# Altium PCB My主板_V5.PcbDoc
Units mil, origin at the board's own origin, x right, y up, seen from the top; angles counter-clockwise.
Board outline 4125 x 2480.2 mil, 2 copper layers (Top Layer, Bottom Layer); 56 components, 56 nets, 301 pads, 42 vias.
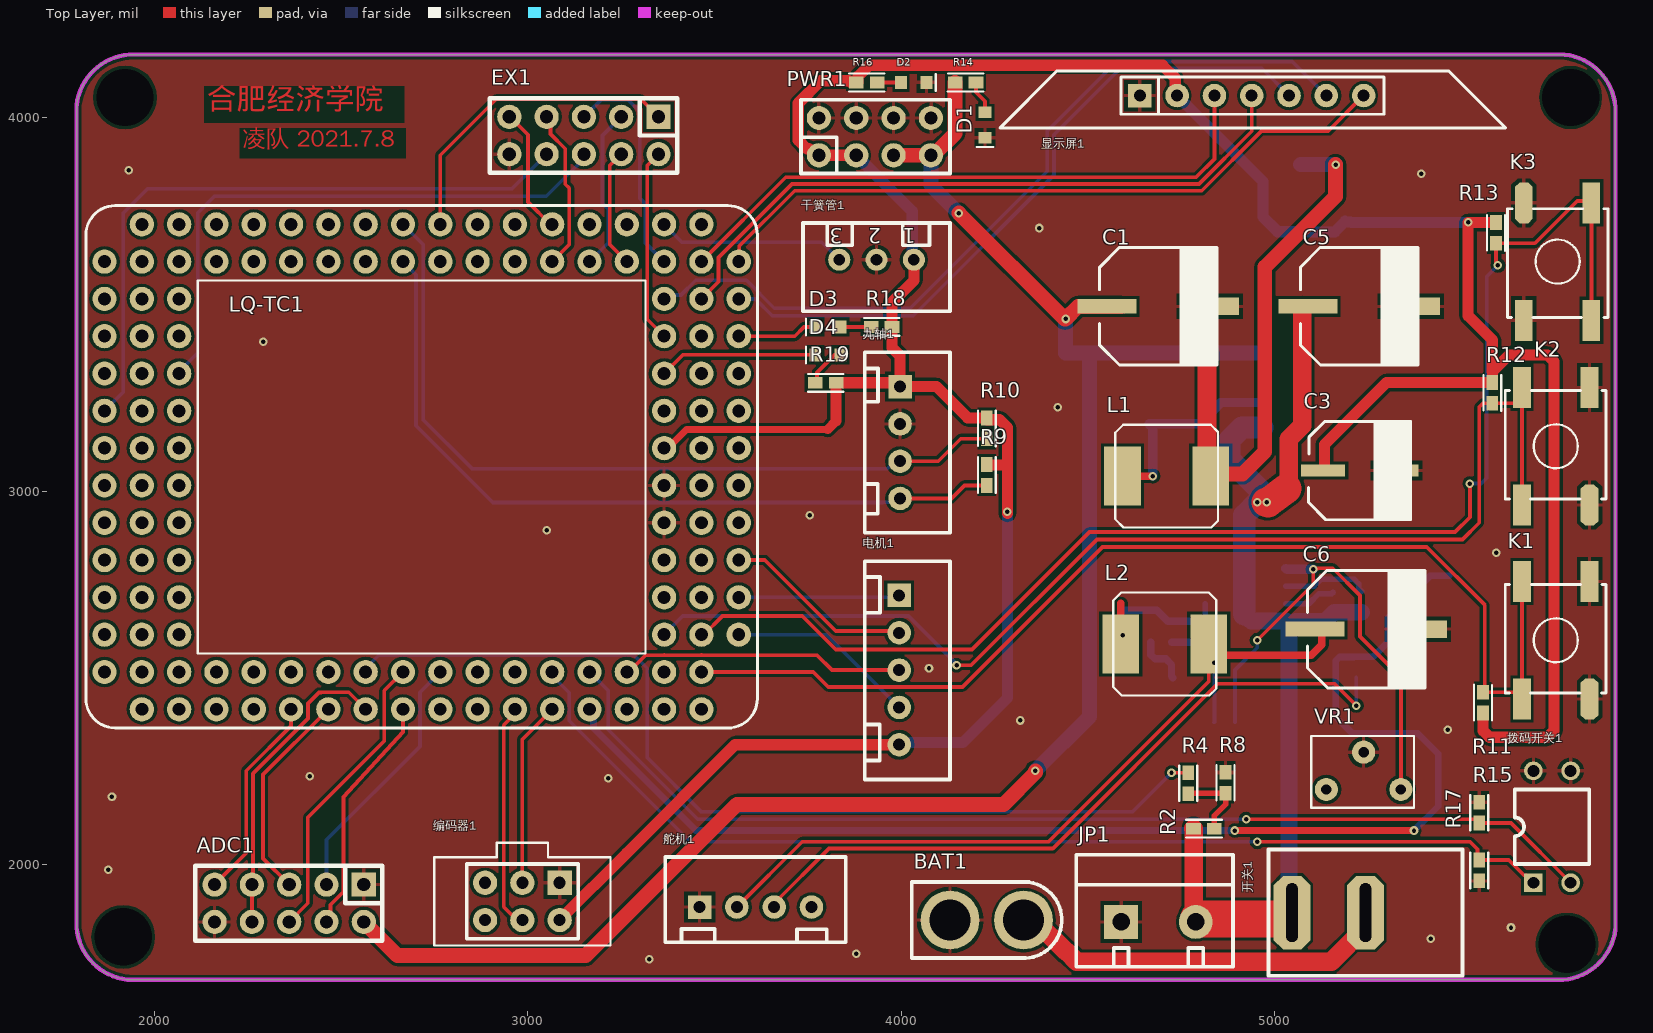
[diagram p0: Top Layer view]
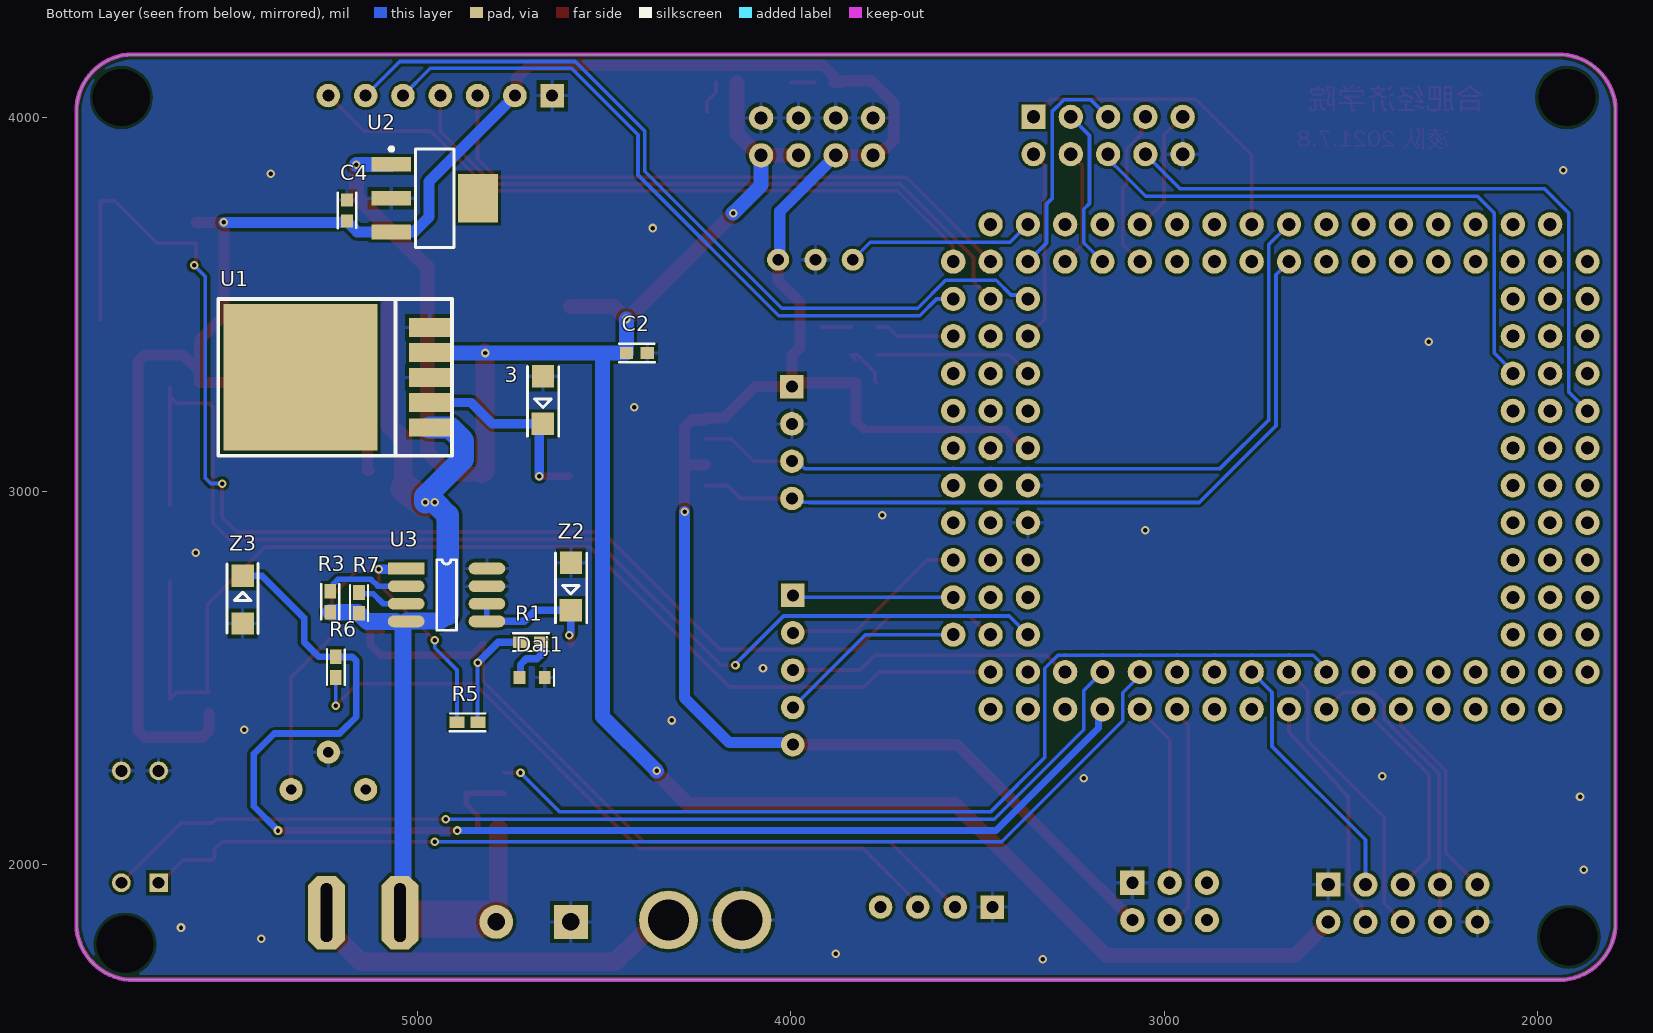
[diagram p1: Bottom Layer view, seen from below]

## Layer stack, top to bottom
Top Solder: solder mask 0.4, Solder Resist, Dk 3.5
Top Layer: signal copper 1.4
Dielectric 1: dielectric 12.6, FR-4, Dk 4.8
Bottom Layer: signal copper 1.4
Bottom Solder: solder mask 0.4, Solder Resist, Dk 3.5

## Board outline
1790,1830 ccw(c1943.01,1842.73) 1925.4,1690.2 1925.4,1689.8 5775,1689.8 5775,1690 ccw(c5762.27,1843.01) 5914.8,1825.4 5915,1825.4 5915,4030 ccw(c5761.99,4017.27) 5779.6,4169.8 5779.6,4170 1930,4170 ccw(c1942.73,4016.99) 1790.2,4034.6 1790,4034.6

## Design rules (kind name [scope] priority, off if disabled: settings)
Clearance [All] p1: gap=8 ignorepadtopadclearanceinfootprint=FALSE
PolygonConnect [All] p1: thpad.connectstyle=Relief thpad.reliefconductorwidth=10 thpad.reliefentries=4 thpad.polygonreliefangle="90 Angle" thpad.airgapwidth=10 smdpad.connectstyle=Relief smdpad.reliefconductorwidth=10 smdpad.reliefentries=4 smdpad.polygonreliefangle="90 Angle" smdpad.airgapwidth=10 via.connectstyle=Direct via.reliefconductorwidth=10 via.reliefentries=4 via.polygonreliefangle="90 Angle" via.airgapwidth=10
RoutingVias [All] p1: holewidth=12 width=25 viastyle="Through Hole" minholewidth=12 minwidth=22 maxholewidth=12 maxwidth=50
SolderMaskExpansion [All] p1: expansion=4 istentingtop=FALSE
Width 12V [InNetClass('12V')] p1: maxlimit=100 minlimit=10 preferedwidth=50
Width 5V [InNetClass('5V')] p2: maxlimit=100 minlimit=10 preferedwidth=40
Width 3.3V [InNetClass('3.3V')] p3: maxlimit=100 minlimit=10 preferedwidth=30
Width [All] p4: maxlimit=100 minlimit=10 preferedwidth=10
30 further rules are at their usual default settings.

## Classes and differential pairs
net class 3.3V: 3.3V
net class 5V: 5V
net class 12V: BAT12V VCC12V

## Components (designator, comment, footprint, x,y, rotation, side; value= is the part's Value field where it differs from the comment)
3 "1N5824" LQ_1206D 4664.61,3307.56 r270 bottom (schematic designator Z1)
ADC1 "双排针2*5 2.5mm" LQ_IDC5X2 2560,1945 r180 top
BAT1 "XT30UPB-M公头" LQ_XT30UPB-F 4230,1850 r180 top
C1 "470uf/16V  8*10" LQ_C8X10 4690,3495 r180 top
C2 "104nF" LQ_C0603 4441,3370 r180 bottom value=104
C3 "470uf/10V  6.3*7.7" LQ_C6d3X7d7 5230,3055 r180 top
C4 "104nF" LQ_C0603 5190,3780 r270 bottom value=104
C5 "220uf/16V  8*10" LQ_C8X10 5228.43,3495 r180 top
C6 "470uf/16V  8*10" LQ_C8X10 5247.2,2630 r180 top
D1 "LED红" LQ_LED0603R 4225,4015 r270 top
D2 "LED红" LQ_LED0603R 4000,4095 r0 top
D3 "LED红" LQ_LED0603R 3838,3440 r180 top
D4 "LED红" LQ_LED0603R 3838,3365 r180 top
Daj1 "LED红" LQ_LED0603R 4728,2500 r180 bottom
EX1 "单排针2*5-2.54mm" LQ_IDC5X2 3350,4003 r180 top
JP1 "HDR-1X2" KF301-5.0-2P 4790,1845 r0 top
K1 "微动开关6*6*6" LQ_BT4SMT 5755,2600 r180 top
K2 "微动开关6*6*6" LQ_BT4SMT 5755,3120 r180 top
K3 "微动开关6*6*6" LQ_BT4SMT 5760,3615 r0 top
L1 "33uH" LQ_L7X7 4593.78,3040 r0 top
L2 "33uH" LQ_L7X7 4588.78,2590 r0 top
LQ-TC1 "LQ-TC264-SYSVC" LQ-TC264-SYSVC-S 1965,2415 r0 top
PWR1 "双排针4X2-2.54" LQ_IDC4X2 3780,3900 r90 top
R1 "3K3" LQ_R0603 4669,2595 r0 bottom
R2 "4.7K" LQ_R0603 4784,2095 r0 top
R3 "1K" LQ_R0603 5235,2731 r270 bottom
R4 "2K" LQ_R0603 4770,2245 r270 top
R5 "1K" LQ_R0603 4895,2380 r180 bottom
R6 "2K" LQ_R0603 5220,2556 r270 bottom
R7 "2.7K" LQ_R0603 5158,2672 r90 bottom
R8 "1K" LQ_R0603 4870,2190 r90 top
R9 "2.2K" LQ_R0603 4230,3071 r270 top
R10 "2.2K" LQ_R0603 4230,3140 r90 top
R11 "1K" LQ_R0603 5560,2461 r270 top
R12 "1K" LQ_R0603 5585,3235 r90 top
R13 "1K" LQ_R0603 5595,3664 r90 top
R14 "1K" LQ_R0603 4145,4095 r0 top
R15 "2.2K" LQ_R0603 5550,2110 r90 top
R16 "1K" LQ_R0603 3880,4095 r0 top
R17 "2.2K" LQ_R0603 5550,2011 r270 top
R18 "1K" LQ_R0603 3976,3440 r180 top
R19 "1K" LQ_R0603 3826,3290 r180 top
U1 "LM2596CS-5.0V" LQ_TO-263-5 4968.54,3170.35 r90 bottom
U2 "LM39100 3.3V" SOT223_M 4955,3785 r180 bottom
U3 "AS1015" SOP8 5031.54,2792.24 r180 bottom
VR1 "2k" lq_3266 5140,2200 r0 top
Z2 "1N5824" LQ_1206D 4589.61,2807.56 r270 bottom
Z3 "ZMM3V3" LQ_1206D 5470,2645 r90 bottom
九轴1 "插针1*4" LQ_XH254-4P 4017.05,3280 r270 top
干簧管1 "XH254-3P" LQ_XH254-3P 4034.37,3620 r180 top
开关1 "KCD1-101 117S" "LQ_KCD1-101 117S" 5245,1870 r0 top
拨码开关1 "SW-DIP2" DIP4 5695,1950 r90 top
显示屏1 "单排座1*7-2.54" LQ-TFT-180V33 4940,4060 r0 top
电机1 "XH254-4P" LQ_XH254-5P 3995,2520 r270 top
编码器1 "双排针2*3 2.54mm" LQ_ENCODER 3085,1950 r180 top
舵机1 "插针1*4-2.54" LQ_XH254-4P 3460,1904.68 r0 top

## Footprints (in the part's own frame and the unit in brackets; to place one, negate y for a bottom-side part, rotate by r counter-clockwise, add the part's x,y. Pads: shape width x height; smd on the part's side, far side on the other; paste and mask are expansions set on the pad)
DIP4 [mil]
  rect 50x50 hole 32: 1(0,0)
  round 50 hole 32: 2(0,-100) 3(300,-100) 4(300,0)
  silkscreen extent 50,-150 250,50, body extent -45,-170 345,70, height 276
KF301-5.0-2P [mm]
  rect 2.3x2.3 hole 1.2: 1(-5.08,0)
  round 2.3 hole 1.2: 2(0,0)
  silkscreen extent -8.13,-3.05 2.54,4.57, body extent -7.95,-3 2.55,4.6, height 10.05
LQ-TC264-SYSVC-S [mm] "单片机核心板封装库"
  round 1.65 hole 0.88: 1(5.08,0) 2(5.08,2.54) 3(7.62,0) 4(7.62,2.54) 5(10.16,0) 6(10.16,2.54) 7(12.7,0) 8(12.7,2.54) 9(15.24,0) 10(15.24,2.54) 11(17.78,0) 12(17.78,2.54) 13(20.32,0) 14(20.32,2.54) 15(22.86,0) 16(22.86,2.54) 17(25.4,0) 18(25.4,2.54) 19(27.94,0) 20(27.94,2.54) 21(30.48,0) 22(30.48,2.54) 23(33.02,0) 24(33.02,2.54) 25(35.56,0) 26(35.56,2.54) 27(38.1,0) 28(38.1,2.54) 30(38.1,5.08) 31(35.56,5.08) 33(38.1,7.62) 34(35.56,7.62) 36(38.1,10.16) 37(35.56,10.16) 39(38.1,12.7) 40(35.56,12.7) 42(38.1,15.24) 43(35.56,15.24) 45(38.1,17.78) 46(35.56,17.78) 48(38.1,20.32) 49(35.56,20.32) 51(38.1,22.86) 52(35.56,22.86) 54(38.1,25.4) 55(35.56,25.4) 57(38.1,27.94) 58(35.56,27.94) 60(38.1,30.48) 61(35.56,30.48) 62(38.1,33.02) 63(35.56,33.02) 64(33.02,33.02) 65(33.02,30.48) 66(30.48,33.02) 67(30.48,30.48) 68(27.94,33.02) 69(27.94,30.48) 70(25.4,33.02) 71(25.4,30.48) 72(22.86,33.02) 73(22.86,30.48) 74(20.32,33.02) 75(20.32,30.48) 76(17.78,33.02) 77(17.78,30.48) 78(15.24,33.02) 79(15.24,30.48) 80(12.7,33.02) 81(12.7,30.48) 82(10.16,33.02) 83(10.16,30.48) 84(7.62,33.02) 85(7.62,30.48) 86(5.08,33.02) 87(5.08,30.48) 88(2.54,33.02) 89(0,33.02) 90(2.54,30.48) 91(0,30.48) 93(2.54,27.94) 94(0,27.94) 96(2.54,25.4) 97(0,25.4) 99(2.54,22.86) 100(0,22.86) 102(2.54,20.32) 103(0,20.32) 105(2.54,17.78) 106(0,17.78) 108(2.54,15.24) 109(0,15.24) 111(2.54,12.7) 112(0,12.7) 114(2.54,10.16) 115(0,10.16) 117(2.54,7.62) 118(0,7.62) 120(2.54,5.08) 121(0,5.08) 123(2.54,2.54) 124(0,2.54) 126(2.54,0) 127(0,0)
  round 1.65 hole 0.88 mask+0.102: 29(40.64,5.08) 32(40.64,7.62) 35(40.64,10.16) 38(40.64,12.7) 41(40.64,15.24) 44(40.64,17.78) 47(40.64,20.32) 50(40.64,22.86) 53(40.64,25.4) 56(40.64,27.94) 59(40.64,30.48) 92(-2.54,30.48) 95(-2.54,27.94) 98(-2.54,25.4) 101(-2.54,22.86) 104(-2.54,20.32) 107(-2.54,17.78) 110(-2.54,15.24) 113(-2.54,12.7) 116(-2.54,10.16) 119(-2.54,7.62) 122(-2.54,5.08) 125(-2.54,2.54)
  silkscreen extent -3.81,-1.27 41.91,34.29
LQ-TFT-180V33 [mm]
  rect 1.6x1.6 hole 0.82: 1(-7.62,0)
  round 1.6 hole 0.82: 2(-5.08,0) 3(-2.54,0) 4(0,0) 5(2.54,0) 6(5.08,0) 7(7.62,0)
  silkscreen extent -17.13,-2.19 17.27,1.69
LQ_1206D [mil]
  rect 60x60 smd: 1(0,0) 2(127.56,-0.39)
  silkscreen extent -27,-41 161,42, body extent -4,-30 133,29, height 61
lq_3266 [mil]
  round 62 hole 28: 1(0,0) 2(100,100) 3(200,0)
  silkscreen extent -40,-49 235,143
LQ_BT4SMT [mm]
  oct 1.2x2.8 smd: 1(-2.3,4)
  rect 1.2x2.8 smd: 1(-2.3,-4) 2(2.3,4) 2(2.3,-4)
  silkscreen extent -3.42,-3.8 3.44,3.6, body extent -3,-5.08 3,4.92, height 4.54
LQ_C6d3X7d7 [mm]
  rect 3x0.8 smd: 1(2.5,0) 2(-2.5,0)
  silkscreen extent -3.49,-3.37 3.49,3.35, body extent -3.5,-3.3 3.5,3.3, height 7.7
LQ_C8X10 [mm]
  rect 4x1 smd: 1(3.5,0)
  rect 4x1.2 smd: 2(-3.5,0)
  silkscreen extent -4,-4 4,4, body extent -4.95,-4.15 4.95,4.15, height 10.2
LQ_C0603 [mm]
  rect 0.9x0.8 smd: 1(0,0) 2(1.422,0)
  silkscreen extent -0.5,-0.64 1.92,0.64, body extent -0.08,-0.4 1.52,0.4, height 0.3
LQ_ENCODER [mm]
  rect 1.65x1.65 hole 0.82: 1(0,0)
  round 1.65 hole 0.82: 2(0,2.54) 3(2.54,0) 4(2.54,2.54) 5(5.08,0) 6(5.08,2.54)
  silkscreen extent -3.46,-2.73 8.54,4.27, body extent -1.31,-1.31 6.31,3.77, height 8.5
LQ_IDC4X2 [mm]
  round 1.65 hole 0.9: 1(0,0) 2(2.54,0) 3(0,-2.54) 4(2.54,-2.54) 5(0,-5.08) 6(2.54,-5.08) 7(0,-7.62) 8(2.54,-7.62)
  silkscreen extent -1.24,-8.92 3.78,1.22, body extent -1.17,-9.01 3.83,1.4, height 8.5
LQ_IDC5X2 [mm]
  rect 1.65x1.65 hole 0.9: 1(0,0)
  round 1.65 hole 0.9: 2(0,2.54) 3(2.54,0) 4(2.54,2.54) 5(5.08,0) 6(5.08,2.54) 7(7.62,0) 8(7.62,2.54) 9(10.16,0) 10(10.16,2.54)
  silkscreen extent -1.27,-1.27 11.48,3.81, body extent -1.25,-1.26 11.45,3.82, height 8.5
"LQ_KCD1-101 117S" [mm]
  oct 2.5x5 hole 0.8 slot 4 at 90 deg: 1(0,0) 2(-5,0)
  silkscreen extent -6.61,-4.3 6.6,4.3
LQ_L7X7 [mm]
  rect 2.5x4 smd: 1(0,0) 2(6,0)
  silkscreen extent -0.5,-3.5 6.5,3.5
LQ_LED0603R [mm]
  rect 0.8x0.9 smd: 1(0,0) 2(1.727,0)
  silkscreen extent 2.36,-0.56 2.36,0.58, body extent 0.02,-0.45 1.72,0.45, height 0.9
LQ_R0603 [mm]
  rect 1x0.8 smd: 1(0,0) 2(1.422,0)
  silkscreen extent -0.5,-0.61 1.92,0.61, body extent -0.08,-0.4 1.52,0.4, height 0.48
LQ_TO-263-5 [mil]
  rect 393.7x413.39 smd: 0(134.65,346.46)
  rect 48x110 smd: 1(0,0)
  rect 50x110 smd: 2(67,0) 3(134,0) 4(201,0) 5(268,0)
  silkscreen extent -76,-60 344,567, body extent -65,-16 335,536, height 180
LQ_XH254-3P [mm]
  round 1.5 hole 0.8: 1(0,0) 2(2.54,0) 3(5.08,0)
  silkscreen extent -2.46,-2.5 7.54,3.5, body extent -2.43,-2.37 7.57,3.33, height 7
LQ_XH254-4P [mm]
  rect 1.6x1.6 hole 0.82: 1(0,-0.5)
  round 1.6 hole 0.82: 2(2.54,-0.5) 3(5.08,-0.5) 4(7.62,-0.5)
  silkscreen extent -2.33,-2.9 9.96,2.9, body extent -2.45,-2.81 10.05,2.89, height 7
LQ_XH254-5P [mm]
  rect 1.6x1.6 hole 0.82: 1(-5.08,0)
  round 1.6 hole 0.82: 2(-2.54,0) 3(0,0) 4(2.54,0) 5(5.08,0)
  silkscreen extent -7.42,-2.34 7.45,3.46, body extent -7.52,-2.31 7.48,3.39, height 7
LQ_XT30UPB-F [mm]
  round 4 hole 2.8: 1(2.5,0) 2(-2.5,0)
  silkscreen extent -5.1,-2.59 5.11,2.6
SOP8 [mm]
  rect 2.5x0.8 smd: 1(0,0)
  oval 2.5x0.8 smd: 2(0,-1.2) 3(0,-2.4) 4(0,-3.6) 5(5.5,-3.6) 6(5.5,-2.4) 7(5.5,-1.2) 8(5.5,0)
  silkscreen extent 2.08,-4.2 3.41,0.6
SOT223_M [mm] "SOT223, 4-Leads, Body 6.5x3.5mm, Pitch 2.3mm, Lead Span 7mm, IPC Low Density"
  rect 2.7x1 smd: 1(-2.95,2.3) 2(-2.95,0) 3(-2.95,-2.3)
  rect 2.7x3.3 smd: 4(2.95,0)
  silkscreen extent -3.08,-3.35 1.3,3.47, body extent -1.85,-3.35 1.85,3.35, height 1.7

## Part data
3 Z2 Z3: library part LQ_D, "Schottky Diode"
ADC1: library part CON10, "Connector"
BAT1: library part LQ_PIN2, "Jumper"
C1 C3 C5 C6: library part "CAPACITOR POL", "Capacitor"
C2 C4: library part Cap, "Capacitor", LatestRevisionDate=17-Jul-2002, LatestRevisionNote="Re-released for DXP Platform.", PackageDescription="Radial Cap, Thru-Hole; 2 Leads; 0.3 in Pin Spacing", PackageReference=RAD-0.3, Published=8-Jun-2000, Publisher="Altium Limited"
D1 D2 D3 D4: library part LED
Daj1: library part LQ_LED
EX1: library part "HEADER 5X2"
JP1: library part "Header 2_1", "2P接插件", BOM名称=2P接插件, 学习资源=www.ooocke.com, 版权归属=源创客
K1 K2 K3: library part 微动开关
L1 L2: library part INDUCTOR
PWR1: library part "HEADER 4X2"
R1 R2 R3 R4 R5 R6 R7 R8 R9 R10 R11 R12 R13 R14 R15 R16 R17 R18 R19: library part RES2
U1: library part LM2575T
U2: library part VOLTREG
VR1: library part "RESISTOR TAPPED"
九轴1 舵机1: library part CON4, "Connector"
干簧管1: library part "HEADER 3"
开关1: library part LQ_SWMTS102, "LQ_SWMTS102"
显示屏1: library part LQ_OLED128X64
电机1: library part "Header 5", "Header, 5-Pin", LatestRevisionDate=17-Jul-2002, LatestRevisionNote="Re-released for DXP Platform.", Publisher="Altium Limited"
编码器1: library part "Header 3X2", "Header, 3-Pin, Dual row", LatestRevisionDate=17-Jul-2002, LatestRevisionNote="Re-released for DXP Platform.", Publisher="Altium Limited"

## Free pads (board coordinates)
  round 60 hole 153.54: 2(1915,1805) 2(1920,4055) 2(5785,1785) 2(5795,4055)

## Via types
v1: diameter 23, hole 12, Top Layer to Bottom Layer, tented both sides, 42 vias

## Nets (pads, with @x,y where several pads share a name; then routed paths per layer and width w, separated by ;. In a path a pad name is that pad's centre, name@x,y a point inside that pad or via, vN(x,y) a via of type N, cw(c..) or ccw(c..) an arc to the next point about the centre after c; other vN are vias at no path point)
3.3V: C3.1 C4.2 LQ-TC1.46 PWR1.1 PWR1.3 R9.1 R10.2 R11.2 R12.2 R13.2 R16.1 R18.1 R19.1 U2.3 九轴1.1 干簧管1.1 显示屏1.2 电机1.5 编码器1.2 | length 8951
  Top Layer w18: LQ-TC1.46 3375,3115 3425,3165 3803.43,3165
  Top Layer w25: 3803.43,3165 3826,3187.57
  Top Layer w30: 编码器1.2 3265,2030 3555,2320 电机1.5 ; PWR1.1 3770.54,3900 3753.25,3917.29 3747.71,3917.29 3724.52,3940.48 3724.52,4039.52 3785,4100 3860.78,4100 3865.03,4095.75 3875.32,4095.75 3876.06,4095 3883.94,4095 3884.68,4095.75 3884.68,4105 3884.68,4111.65 3914.13,4141.09 4701.33,4141.09 4735,4107.43 4735,4065 显示屏1.2 ; PWR1.1@3801.54,3900 PWR1.3 ; 3826,3187.57 R19.1 3987.36,3290 九轴1.1 3997.36,3362.64 3976,3384 R18.1 3976,3506 4034.37,3564.37 干簧管1.1 ; 九轴1.1@4020,3280 4095,3280 4179,3196 R10.2 4230,3192.06 4230.75,3191.32 4263.69,3191.32 4285,3170 v1(4285,2945) v1@4285,2940.07 ; R9.1 4230,3070.75 4230.75,3070 4270.07,3070 ; C3.1 5134.25,3055 5135,3055.75 5135,3125 5301,3291 R12.2 5585.75,3291.75 5585.75,3320.75 5630,3365 5732.43,3365 5750,3347.43 5750,2357.57 5732.43,2340 5577.57,2340 5560,2357.57 R11.2 ; 5585,3320.75 5585,3405 5520,3470 v1(5520,3720) R13.2
  Bottom Layer w30: PWR1.3 4030,3750 4030,3624.37 干簧管1.1 ; 电机1.5 4001.31,2326.31 4166.31,2326.31 4285,2445 v1(4285,2945) ; 显示屏1.2 4970,3830 4970,3735 5010,3695 5070.59,3695 U2.3 5162.42,3694.45 C4.2@5190,3722.03 ; C4.2 C4.2@5190,3722.03 ; v1(5520,3720) 5206.25,3720 5204.97,3721.28 5190.75,3721.28 C4.2@5190,3722.03
5V: ADC1.2 C1.1 C2.1 L1.2 PWR1.5 PWR1.7 R14.1 U1.4 U2.1 | length 6373.3
  Top Layer w40: ADC1.2 2650,1755 3155,1755 3560,2160 4275,2160 4360,2245 v1(4360,2250) ; PWR1.5 PWR1.7 4086.75,3900 4145,3958.25 R14.1 ; v1(4155,3745) 4438.8,3461.2 v1(4441,3461.2) 4474.8,3495 C1.1@4591.57,3495 ; L1.2@4820,3050 L1.2 4836.12,3046.12 4915.78,3046.12 4975,3105.34 4975,3600 5165,3790 v1(5165,3875)
  Top Layer w50: L1.2@4820,3050 v1(4820,3370)
  Bottom Layer w40: PWR1.7 4080,3820 v1(4155,3745) ; v1(4360,2250) 4505,2395 4505,3370 ; v1(4441,3461.2) C2.1 4505,3370 ; U1.4 4967.19,3370 v1(4820,3370) 4505,3370 ; U2.1 5164.45,3875.55 v1(5165,3875)
13.0: EX1.1 LQ-TC1.74 | length 851.6
  Top Layer w10: LQ-TC1.74 2765,3900 2915,4050 3303,4050 EX1.1
AN1: ADC1.3 LQ-TC1.14 | length 696.3
  Bottom Layer w10: ADC1.3 2460,2065 2710.48,2315.48 2710.48,2460.48 LQ-TC1.14
AN2: ADC1.4 LQ-TC1.11 | length 650.8
  Top Layer w10: ADC1.4 2470.52,1855.52 2470.52,1891.2 2505.48,1926.16 2505.48,2180.06 2665,2354.34 LQ-TC1.11
AN3: ADC1.5 LQ-TC1.7 | length 571.5
  Top Layer w10: ADC1.5 2290,2015 2290,2240 LQ-TC1.7
AN4: ADC1.6 LQ-TC1.12 | length 796.3
  Top Layer w10: ADC1.6 2410,1895 2410,2125 2615,2330 2615,2465 LQ-TC1.12
AN5: ADC1.7 ADC1.8 LQ-TC1.9 | length 833.6
  Top Layer w10: ADC1.8 ADC1.7 2263,1948 2263,2242.54 2410.48,2390.02 2410.48,2430.48 2440,2460 2445.68,2460 2446.16,2460.48 2519.52,2460.48 LQ-TC1.9
AN6: ADC1.9 LQ-TC1.5 | length 554.9
  Top Layer w10: ADC1.9 2245,2030 2245,2250 2365,2370 LQ-TC1.5
AN7: LQ-TC1.10 R4.1 | length 2587.5
  Top Layer w10: v1(4725,2245) R4.1
  Bottom Layer w10: LQ-TC1.10 2565,2525 2600,2560 2658.41,2560 cw(c2665,2515) 2671.59,2560 2758.41,2560 cw(c2765,2515) 2771.59,2560 2858.41,2560 cw(c2865,2515) 2871.59,2560 2958.41,2560 cw(c2965,2515) 2971.59,2560 3058.41,2560 cw(c3065,2515) 3071.59,2560 3158.41,2560 cw(c3165,2515) 3171.59,2560 3258.41,2560 cw(c3265,2515) 3271.59,2560 3284.32,2560 3319.52,2524.8 3319.52,2285.48 3465,2140 4620,2140 v1(4725,2245)
BAT12V: C5.1 JP1.2 R2.1 R3.2 R7.1 U1.1 U3.4 开关1.2 | length 2795.2
  Top Layer w50: R2.1 4785,2094 4785,1850 JP1.2 ; 开关1.2@5030.91,1852.76 开关1.2 ; 5033.94,3007.12 5039.52,3012.7 5039.52,3139.52 5075,3175 C5.1@5075,3489.69
  Top Layer w80: v1(4980,2970) 4983.47,2969.49 5033.94,3007.12
  Top Layer w100: JP1.2@4797.76,1852.76 开关1.2@5030.91,1852.76
  Bottom Layer w45: 4920,2670 4938.49,2651.51 5030.54,2651.51 U3.4 5033.09,2650.51 5039.84,2643.76 5039.84,1886.05 开关1.2@5035.97,1882.18 ; U3.4@5058.25,2650 5136,2650 R7.1 ; R7.1@5161,2675 R3.2
  Bottom Layer w60: 4920,2670 4920,2935 v1(4955,2970) ; U1.1 4914.47,3170.35 4879.32,3135.21 4879.32,3085.5 4980,2984.83 v1(4980,2970) ; 开关1.2@5035.97,1882.18 开关1.2
"Dial SW0": LQ-TC1.20 R17.1 拨码开关1.1 | length 2927.9
  Top Layer w10: v1(4955,2060) 5525,2060 5545.17,2039.83 5545.17,2015.83 R17.1 5629,2011 5670,1970 5675,1970 拨码开关1.1
  Bottom Layer w10: LQ-TC1.20 3065,2505 3110.48,2459.52 3110.48,2384.52 3435,2060 v1(4955,2060)
"Dial SW1": LQ-TC1.22 R15.1 拨码开关1.2 | length 2925.5
  Top Layer w10: v1(4925,2120) 5540,2120 R15.1 5575,2110 5635,2110 拨码开关1.2
  Bottom Layer w10: LQ-TC1.22 3215,2465 3215,2360 3455,2120 v1(4925,2120)
ENcoder1A: LQ-TC1.19 编码器1.3 | length 498.1
  Top Layer w10: 编码器1.3 2985,2334.54 3065,2414.54 LQ-TC1.19
ENcoder1B: LQ-TC1.17 编码器1.4 | length 606.7
  Top Layer w10: LQ-TC1.17 2965,2402.5 2935,2372.5 2935,1885.38 2970.38,1850 编码器1.4
GND: 3.1 ADC1.1 ADC1.10 BAT1.1 C1.2 C2.2 C3.2 C4.1 C5.2 C6.2 D1.2 D2.2 Daj1.2 EX1.10 JP1.1 K1.1 K2.1 K3.1 LQ-TC1.40 LQ-TC1.43 PWR1.2 PWR1.4 PWR1.6 PWR1.8 R8.2 R15.2 R17.2 U1.3 U1.5 U2.2 U3.7 U3.8 VR1.2 Z2.1 Z3.1 九轴1.2 干簧管1.2 拨码开关1.3 拨码开关1.4 显示屏1.1 编码器1.1 舵机1.1
  other v1: 3325,1745 3880,1760 5420,1800 5635,1830 1875,1985 1885,2180 3215,2230 2415,2235 5465,2360 4320,2385 4075,2525 5595,2835 3050,2895 3755,2935 4420,3225 2290,3400 4370,3705 5395,3850 1930,3860
KEY0: K1.2 LQ-TC1.28 R11.1 | length 2998.7
  Top Layer w10: LQ-TC1.28 3765,2515 3805,2475 4165,2475 4540,2850 5409.14,2850 5565,2694.14 5565,2466 R11.1 5565,2461 5645.97,2461 5664.45,2442.52 K1.2@5664.45,2757.48
KEY1: K2.2 LQ-TC1.31 R12.1 | length 3171.9
  Top Layer w10: v1(4148.79,2532.93) 4187.93,2532.93 4525,2870 5505,2870 5550,2915 5550,3225 5560,3235 R12.1 5645.83,3235 K2.2@5664.45,3253.62 ; K2.2@5664.45,2962.52 K2.2@5664.45,3253.62 ; K2.2@5664.45,3277.48 K2.2@5664.45,3253.62
  Bottom Layer w10: LQ-TC1.31 3415,2665 4020,2665 4148.79,2536.21 v1(4148.79,2532.93)
KEY2: K3.2 LQ-TC1.30 R13.1 | length 3672.1
  Top Layer w10: LQ-TC1.30 3471.2,2615 3521.2,2665 3735,2665 3825,2575 4190,2575 4505,2890 5485,2890 5525,2930 v1(5525,3020) ; v1(5600,3605) 5600,3608.52 5595,3613.52 R13.1 5699,3664 5812.38,3777.38 5850.55,3777.38 5850.55,3772.48 K3.2@5850.55,3457.52
  Bottom Layer w10: v1(5525,3020) 5555,3020 5570,3035 5570,3575 v1(5600,3605)
MB_LED0: D4.2 LQ-TC1.52 | length 425.7
  Top Layer w10: LQ-TC1.52 3415,3365 D4.2
MB_LED1: D3.2 LQ-TC1.53 | length 215.4
  Top Layer w10: LQ-TC1.53 3715,3415 3740,3440 D3.2
"MT1 N": LQ-TC1.24 电机1.3 | length 765.3
  Top Layer w10: LQ-TC1.24 3270,2515 3315,2560 3358.41,2560 cw(c3365,2515) 3371.59,2560 3458.41,2560 cw(c3465,2515) 3471.59,2560 3775,2560 3815,2520 电机1.3
MT1_P: LQ-TC1.29 电机1.4 | length 510.8
  Bottom Layer w10: LQ-TC1.29 3800,2615 电机1.4
MT2_N: LQ-TC1.32 电机1.1 | length 432.1
  Bottom Layer w10: LQ-TC1.32 3990,2715 电机1.1
MT2_P: LQ-TC1.35 电机1.2 | length 510.8
  Top Layer w10: LQ-TC1.35 3635,2815 3824.95,2625.05 3989.95,2625.05 电机1.2
NetC6_1: C6.1 L2.2 R1.2 R5.2 舵机1.2 | length 2320.8
  Top Layer w10: 舵机1.2 3735,2060 4395.23,2060 4825,2489.77 L2.2
  Top Layer w20: L2.2 4855,2560 5100,2560 5127.73,2587.73 5127.73,2626.15 5131.57,2630 5103.29,2630 C6.1@5097.54,2624.25
  Bottom Layer w10: R5.2 4840,2381 v1(4840,2540)
  Bottom Layer w20: R1.2 4785,2595 v1(4840,2540)
NetD1_1: D1.1 R14.2 | length 89.9
  Top Layer w10: R14.2 4201,4069 4225,4045 D1.1
NetD2_1: D2.1 R16.2 | length 64
  Top Layer w10: R16.2 D2.1
NetD3_1: D3.1 R18.2 | length 82
  Top Layer w10: D3.1 R18.2
NetD4_1: D4.1 R19.2 | length 129.8
  Top Layer w10: R19.2 3774.89,3294.89 3774.89,3318.04 3821.85,3365 D4.1 3838,3363.03 D4.1@3827.25,3352.28
NetDaj1_1: Daj1.1 R1.1 | length 136.6
  Bottom Layer w20: R1.1 4669,2561.72 4680.72,2550 4710,2550 4725,2535 4725,2503 Daj1.1
NetL1_1: 3.2 L1.1 U1.2 | length 552.7
  Top Layer w20: L1.1 v1(4675,3040)
  Bottom Layer w25: v1(4675,3040) 4675,3170 3.2 4800,3180 4857.35,3237.35 U1.2
NetL2_1: L2.1 U3.5 U3.6 Z2.2 | length 461
  Top Layer w20: L2.1 4588.78,2698.78
  Bottom Layer w15: U3.5 U3.6
  Bottom Layer w20: v1(4593.78,2613.78) 4593.78,2614.59 4590,2618.37 Z2.2 4685,2680 4714.49,2650.51 U3.5
NetR2_2: R2.2 R4.2 R8.1 | length 207.4
  Top Layer w15: R4.2@4770,2190 R8.1 4870,2160 4840,2130 R2.2
NetR3_1: R3.1 U3.2 | length 231.3
  Bottom Layer w15: U3.2 5107.47,2745 5125.66,2763.18 5214.78,2763.18 5226.75,2751.21 5226.75,2739.25 R3.1
NetR5_1: R5.1 U3.1 VR1.3 | length 1298
  Top Layer w10: v1(4955,2600) 5105,2750 v1(5105,2790) 5107.49,2792.49 5116.68,2792.49 5117.19,2793 5157,2793 5230,2720 5230,2610 5340,2500 VR1.3
  Bottom Layer w10: R5.1 4895,2520 4955,2580 v1(4955,2600) ; U3.1 U3.1@5034.79,2795.5
  Bottom Layer w25: U3.1 5033.78,2790 v1(5105,2790)
NetR6_2: R6.2 舵机1.3 | length 1913.2
  Top Layer w10: 舵机1.3 3660,1895 3807,2042 4407,2042 4848.76,2483.76 5161.24,2483.76 v1(5220,2425)
  Bottom Layer w10: v1(5220,2425) R6.2
NetR7_2: R7.2 U3.3 | length 139
  Bottom Layer w15: U3.3 5092.76,2697.76 5120,2725 5155,2725 R7.2
P15.2: EX1.3 LQ-TC1.67 | length 435.8
  Bottom Layer w10: LQ-TC1.67 3215.26,3665.26 3215.26,3755.26 3200,3770.52 3200,3953 EX1.3
P15.5: EX1.5 LQ-TC1.61 | length 611
  Bottom Layer w10: EX1.5 3195.48,4048.48 3231.16,4048.48 3268.84,4048.48 3273.66,4043.66 3300,4017.32 3300,3784.04 3315,3769.04 3315,3665 LQ-TC1.61
P15.7: EX1.7 LQ-TC1.69 | length 431.9
  Top Layer w10: EX1.7 3060.52,3992.48 3060.52,3956.8 3100,3917.32 3100,3822.38 3110.48,3811.9 3110.48,3660.48 LQ-TC1.69
P15.8: EX1.9 LQ-TC1.68 | length 339.7
  Top Layer w10: EX1.9 2952,4003 3000,3955 3000,3775 3060,3715 LQ-TC1.68
Reed: LQ-TC1.63 干簧管1.3 | length 508.7
  Bottom Layer w10: LQ-TC1.63 3413.07,3666.93 3787.44,3666.93 干簧管1.3
RX1: EX1.2 LQ-TC1.55 | length 519.5
  Top Layer w10: EX1.2 3319.52,3872.52 3319.52,3460.48 LQ-TC1.55
RX3: EX1.6 LQ-TC1.99 | length 1558.3
  Bottom Layer w10: LQ-TC1.99 2065,3320 2115,3370 2115,3745 2160,3790 3049.14,3790 3104.14,3845 3150,3890.86 EX1.6
SCL: LQ-TC1.77 R9.2 九轴1.4 | length 2065.8
  Top Layer w10: 九轴1.4@4020,2980 4135,2980 4170,3015 R9.2
  Bottom Layer w10: LQ-TC1.77 2700,3580 2700,3175 2905.48,2969.52 3950.48,2969.52 3950.87,2969.91 3987.27,2969.91 九轴1.4
SDA: LQ-TC1.76 R10.1 九轴1.3 | length 2125.2
  Top Layer w10: 九轴1.3@4020,3080 4100,3080 4160,3140 R10.1
  Bottom Layer w10: LQ-TC1.76 2665,3710 2670,3710 2719.52,3660.48 2719.52,3190.48 2847.07,3062.93 2850,3060 3358.41,3060 cw(c3365,3015) 3371.59,3060 3458.41,3060 cw(c3465,3015) 3471.59,3060 3558.41,3060 cw(c3565,3015) 3571.59,3060 3963.02,3060 3983.02,3080 九轴1.3
SErvo_P1: LQ-TC1.21 R6.1 Z3.2 | length 3503
  Top Layer w18: v1(4895,2090) v1(5375,2090)
  Bottom Layer w18: LQ-TC1.21 3175.52,2404.48 3175.52,2364.48 3450,2090 v1(4895,2090) ; v1(5375,2090) 5440,2155 5440,2295 5385,2350 5210,2350 5165,2395 5165,2544.46 5175.54,2555 5213.25,2555 5214.25,2556 5266,2556 5305,2595 5305,2660 5417.56,2772.56 Z3.2
TFT_CS: LQ-TC1.59 显示屏1.7 | length 1882.8
  Top Layer w10: LQ-TC1.59 3566.62,3616.62 3566.62,3656.62 3715,3805 4805.91,3805 4965.91,3965 5145,3965 显示屏1.7
TFT_DC: LQ-TC1.58 显示屏1.6 | length 2206.6
  Bottom Layer w10: LQ-TC1.58 3375.52,3525.52 3410.52,3525.52 3450,3565 3585.46,3565 3660.46,3490 4025,3490 4392,3857 4392,3965 4578.09,4151.09 5048.91,4151.09 显示屏1.6 显示屏1.6@5140,4055
TFT_RST: LQ-TC1.56 显示屏1.5 | length 1861.8
  Bottom Layer w10: LQ-TC1.56 3610,3515 3655,3470 4033,3470 4410,3847 4410,3955 4588.09,4133.09 4966.91,4133.09 显示屏1.5
TFT_SCK: LQ-TC1.57 显示屏1.4 | length 1795
  Top Layer w10: LQ-TC1.57 3510.84,3560.84 3510.84,3626.29 3707.54,3823 3735,3823 4798.46,3823 4940,3964.54 显示屏1.4
TFT_SDI: LQ-TC1.60 显示屏1.3 | length 1658.9
  Top Layer w10: LQ-TC1.60 3691,3841 4791,3841 4840,3890 显示屏1.3
TX1: EX1.4 LQ-TC1.65 | length 319.5
  Top Layer w10: EX1.4 3219.52,3872.52 3219.52,3660.48 LQ-TC1.65
TX3: EX1.8 LQ-TC1.104 | length 1751.2
  Bottom Layer w10: LQ-TC1.104 1915.26,3265.26 1915.26,3745.26 1980,3810 2957,3810 EX1.8
VCC12V: BAT1.2 开关1.1 | length 1043.9
  Top Layer w50: BAT1.2@4324.66,1850 BAT1.2 4357.51,1850 4442.51,1765 4445,1765 4471.43,1738.57 5152.83,1738.57 5245,1830.75 开关1.1
pads on no net: LQ-TC1.1 LQ-TC1.2 LQ-TC1.3 LQ-TC1.4 LQ-TC1.6 LQ-TC1.8 LQ-TC1.13 LQ-TC1.15 LQ-TC1.16 LQ-TC1.18 LQ-TC1.23 LQ-TC1.25 LQ-TC1.26 LQ-TC1.27 LQ-TC1.33 LQ-TC1.34 LQ-TC1.36 LQ-TC1.37 LQ-TC1.38 LQ-TC1.39 LQ-TC1.41 LQ-TC1.42 LQ-TC1.44 LQ-TC1.45 LQ-TC1.47 LQ-TC1.48 LQ-TC1.49 LQ-TC1.50 LQ-TC1.51 LQ-TC1.54 LQ-TC1.62 LQ-TC1.64 LQ-TC1.66 LQ-TC1.70 LQ-TC1.71 LQ-TC1.72 LQ-TC1.73 LQ-TC1.75 LQ-TC1.78 LQ-TC1.79 LQ-TC1.80 LQ-TC1.81 LQ-TC1.82 LQ-TC1.83 LQ-TC1.84 LQ-TC1.85 LQ-TC1.86 LQ-TC1.87 LQ-TC1.88 LQ-TC1.89 LQ-TC1.90 LQ-TC1.91 LQ-TC1.92 LQ-TC1.93 LQ-TC1.94 LQ-TC1.95 LQ-TC1.96 LQ-TC1.97 LQ-TC1.98 LQ-TC1.100 LQ-TC1.101 LQ-TC1.102 LQ-TC1.103 LQ-TC1.105 LQ-TC1.106 LQ-TC1.107 LQ-TC1.108 LQ-TC1.109 LQ-TC1.110 LQ-TC1.111 LQ-TC1.112 LQ-TC1.113 LQ-TC1.114 LQ-TC1.115 LQ-TC1.116 LQ-TC1.117 LQ-TC1.118 LQ-TC1.119 LQ-TC1.120 LQ-TC1.121 LQ-TC1.122 LQ-TC1.123 LQ-TC1.124 LQ-TC1.125 LQ-TC1.126 LQ-TC1.127 U1.0 U2.4 VR1.1 编码器1.5 编码器1.6 舵机1.4

## Polygon pours and split planes (outlines as drawn)
GND on Bottom Layer "GND_L02_P000" (solid, remove dead copper, pour order 0): 1790,1830 ccw(c1943.01,1842.73) 1925.4,1690.2 1925.4,1689.8 5775,1689.8 5775,1690 ccw(c5762.27,1843.01) 5914.8,1825.4 5915,1825.4 5915,4030 ccw(c5761.99,4017.27) 5779.6,4169.8 5779.6,4170 1930,4170 ccw(c1942.73,4016.99) 1790.2,4034.6 1790,4034.6
GND on Top Layer "GND_L01_P001" (solid, remove dead copper, pour order 1): 1790,1830 ccw(c1943.01,1842.73) 1925.4,1690.2 1925.4,1689.8 5775,1689.8 5775,1690 ccw(c5762.27,1843.01) 5914.8,1825.4 5915,1825.4 5915,4030 ccw(c5761.99,4017.27) 5779.6,4169.8 5779.6,4170 1930,4170 ccw(c1942.73,4016.99) 1790.2,4034.6 1790,4034.6

## Keep-outs
Keep-Out Layer:
  lines w11.81: 1790,4034.6 1790,1830 ccw(c1943.01,1842.73) 1925.4,1690.2 ; 1790.2,4034.6 cw(c1942.73,4016.99) 1930,4170 5779.6,4170 ; 1925.4,1689.8 5775,1689.8 ; 5775,1690 ccw(c5762.27,1843.01) 5914.8,1825.4 ; 5779.6,4169.8 cw(c5761.99,4017.27) 5915,4030 5915,1825.4

## Other copper
Top Layer:
  text "合肥经济学院" at 2140.09,4004.29 h98.43
  text "凌队 2021.7.8" at 2235,3907.14 h78.74

## Text inside footprints (layer, text, board x,y; h text height)
干簧管1: Top Overlay "1" at 4039.37,3704 h40 r180; Top Overlay "2" at 3947.37,3704 h40 r180; Top Overlay "3" at 3844.37,3705 h40 r180